# EAGLE board untitled 2 (EAGLE 7.4.0)
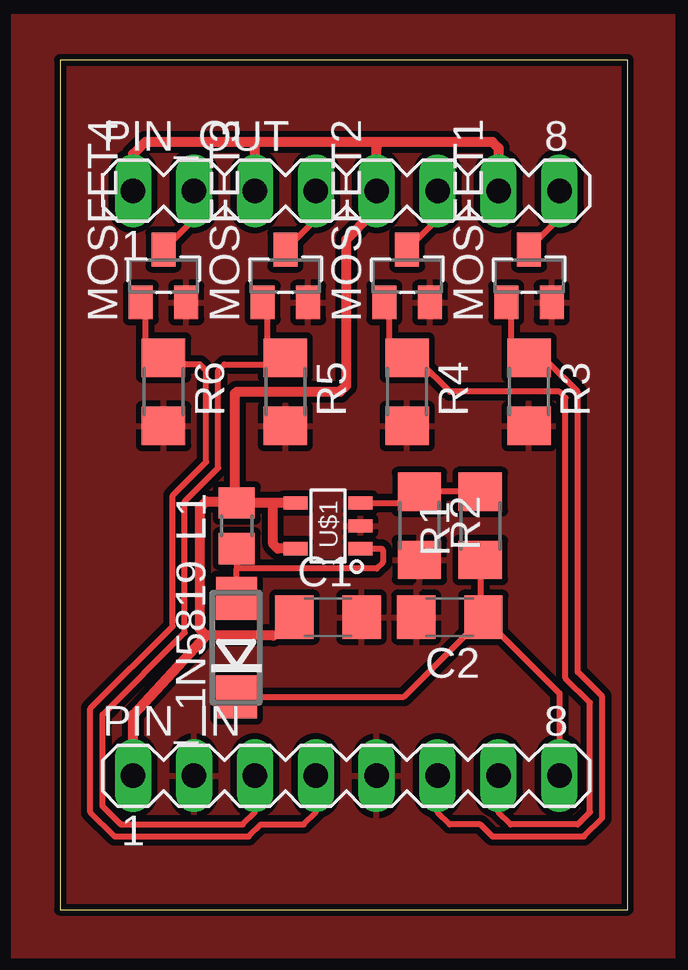
[diagram p0: board, top side]

Size 23.67 x 35.42 mm. Coordinates in mm from the lower left corner, seen from the top.
Outline: 0,0 23.67,0 23.67,35.42 0,35.42 0,0
Copper layers (1*16): Top 0.035mm / dielectric 1.5mm / Bottom 0.035mm
Design rules "default 10mils": minimum track width 10mil, minimum drill 24mil, track to track 10mil, track to pad 10mil, pad to pad 10mil, via to via 10mil, smd to smd 10mil, copper to edge 10mil, drill to drill 10mil, minimum pad ring 10mil, minimum via ring 8mil, stop-mask expansion 4mil, vias tented up to drill 0mil, thermal gap 12mil

## Footprints (pad centres in the part's own frame; a part is rotated, then mirrored left to right if it is on the bottom)
DO214AC = smd 1.8 x 1.7: A 2.05,0; C -2.05,0
C1206 = smd 1.6 x 1.8: 1 -1.4,0; 2 1.4,0
R0805 = smd 1.3 x 1.5: 1 -0.95,0; 2 0.95,0
SOT-23 = smd 1 x 1.4: 1 -0.95,-1.1; 2 0.95,-1.1; 3 0,1.1
MA08-1 = drill 1.016 long: 1 -8.89,0; 2 -6.35,0; 3 -3.81,0; 4 -1.27,0; 5 1.27,0; 6 3.81,0; 7 6.35,0; 8 8.89,0
R1206 = smd 1.6 x 1.803: 1 -1.422,0; 2 1.422,0
SOT-23-5 = smd 1 x 0.55: 1 -1.35,0.95; 2 -1.35,0; 3 -1.35,-0.95; 4 1.35,-0.95; 5 1.35,0.95

## Placement (x,y rotation side)
1N5819  [DO214AC]  7.37,10.92 90 top
C1  1uF  [C1206]  11.18,12.19 0 top
C2  1uF  [C1206]  16.26,12.19 180 top
L1  10uH  [R0805]  7.37,16 90 top
MOSFET1  AO3400A  [SOT-23]  19.56,26.42 0 top
MOSFET2  AO3400A  [SOT-23]  14.48,26.42 0 top
MOSFET3  AO3400A  [SOT-23]  9.4,26.42 0 top
MOSFET4  AO3400A  [SOT-23]  4.32,26.42 0 top
PIN_IN  [MA08-1]  11.94,5.59 0 top
PIN_OUT  [MA08-1]  11.94,29.97 0 top
R1  3k  [R1206]  17.53,16 90 top
R2  1k  [R1206]  14.99,16 270 top
R3  1k  [R1206]  19.56,21.59 270 top
R4  1k  [R1206]  14.48,21.59 270 top
R5  1k  [R1206]  9.4,21.59 270 top
R6  1k  [R1206]  4.32,21.59 270 top
U$1  [SOT-23-5]  11.18,16 180 top

## Library data of the parts
1N5819 = diode
C1 C2 L1 R1-R6 = resistor
MOSFET1-MOSFET4 U$1 = smd-footprints
PIN_IN PIN_OUT = con-lstb; OC_FARNELL: unknown; OC_NEWARK: unknown

## Nets
+5V: 1N5819.C C2.1 PIN_IN.8 R1.1
GND: C1.2 C2.2 MOSFET1.2 MOSFET2.2 MOSFET3.2 MOSFET4.2 PIN_IN.2 PIN_IN.5 R2.2 R3.2 R4.2 R5.2 R6.2 U$1.2
M1_IN: MOSFET1.1 PIN_IN.6 R3.1
M1_OUT: MOSFET1.3 PIN_OUT.8
M2_IN: MOSFET2.1 PIN_IN.7 R4.1
M2_OUT: MOSFET2.3 PIN_OUT.6
M3_IN: MOSFET3.1 PIN_IN.3 R5.1
M3_OUT: MOSFET3.3 PIN_OUT.4
M4_IN: MOSFET4.1 PIN_IN.4 R6.1
M4_OUT: MOSFET4.3 PIN_OUT.2
N$1: 1N5819.A L1.1 U$1.1
N$3: R1.2 R2.1 U$1.3
VCC: C1.1 L1.2 PIN_IN.1 PIN_OUT.1 PIN_OUT.3 PIN_OUT.5 PIN_OUT.7 U$1.4 U$1.5

## Tracks (layer width: path | path; a pad name or v marks a point on that pad's centre or on a via)
+5V
  Top 0.254: R1.1 17.53,12.32 C2.1 | C2.1 20.83,9.02 PIN_IN.8 | 1N5819.C 14.34,8.87 C2.1
GND
  Top 0.254: MOSFET3.2 10.5,25.32 | MOSFET2.2 15.58,25.32 | MOSFET1.2 20.66,25.32 | 14.48,14.99 14.58,14.99 R2.2 | R5.2 9.63,20.17 | R4.2 14.83,20.17
  pour Top (isolate 0.254): -1.78,37.08 25.4,37.08 25.4,-1.78 -1.78,-1.78
M1_IN
  Top 0.254: MOSFET1.1 18.8,25.32 18.8,22.99 19.56,22.99 R3.1 19.71,22.86 20.32,22.86 21.59,21.59 21.59,9.91 22.61,8.89 22.61,3.81 21.84,3.05 18.03,3.05 17.53,3.56 16.26,3.56 15.75,4.06 PIN_IN.6
M1_OUT
  Top 0.254: MOSFET1.3 19.56,27.56 20.83,28.83 PIN_OUT.8
M2_IN
  Top 0.254: MOSFET2.1 13.72,25.32 13.72,22.99 14.48,22.99 R4.1 14.63,22.86 14.99,22.86 16.26,21.59 20.83,21.59 21.08,21.34 21.08,9.65 22.1,8.64 22.1,4.06 21.59,3.56 18.8,3.56 18.29,4.06 PIN_IN.7
M2_OUT
  Top 0.254: MOSFET2.3 15.75,28.79 PIN_OUT.6
M3_IN
  Top 0.254: R5.1 9.37,22.99 8.64,22.99 8.64,25.32 MOSFET3.1 | 9.25,22.86 R5.1 | PIN_IN.3 8.13,4.06 7.62,3.56 2.54,3.56 1.78,4.32 1.78,8.13 5.21,11.56 5.21,17.02 6.6,18.41 6.6,22.48 6.86,22.73 9.12,22.73 R5.1
M3_OUT
  Top 0.254: MOSFET3.3 10.67,28.79 PIN_OUT.4
M4_IN
  Top 0.254: MOSFET4.1 3.56,25.32 3.56,22.99 4.29,22.99 R6.1 4.6,22.73 5.84,22.73 6.1,22.48 6.1,18.67 4.7,17.27 4.7,11.81 1.27,8.38 1.27,4.06 2.29,3.05 7.87,3.05 8.38,3.56 10.16,3.56 10.67,4.06 PIN_IN.4
M4_OUT
  Top 0.254: MOSFET4.3 5.59,28.79 PIN_OUT.2
N$1
  Top 0.254: U$1.1 13.4,15.05 13.46,14.99 13.46,14.48 13.21,14.22 7.37,14.22 | L1.1 7.37,14.22 | 1N5819.A 7.37,14.22
N$2
  pour Top: -2.03,37.34 25.65,37.34 25.65,-2.03 -2.03,-2.03
N$3
  Top 0.254: R1.2 R2.1 14.51,16.95 U$1.3
VCC
  Top 0.254: C1.1 9.65,12.19 8.89,11.43 | 7.3,17.02 L1.2 | 7.3,21.52 7.37,21.59
  Top 0.406: PIN_OUT.1 3.05,31.5 3.56,32 8.13,32 | PIN_OUT.7 18.29,31.75 18.03,32 13.21,32 | PIN_OUT.3 8.13,32 | U$1.4 8.89,16.95 | 8.89,16.95 L1.2 | U$1.5 9.08,15.05 8.89,15.24 8.89,16.95 | 8.89,11.43 6.1,11.43 | 6.1,11.43 5.84,11.68 5.84,16.76 6.1,17.02 7.3,17.02 7.3,21.52 | PIN_IN.1 3.05,8.13 6.1,11.43 | 7.37,21.59 11.68,21.59 11.94,21.84 11.94,27.94 12.95,28.96 12.95,29.72 PIN_OUT.5 13.21,30.99 13.21,31.75 13.21,32 | 13.21,32 8.13,32

## Text on the board
Description: VCC | M4 / OUT | VCC | M3 / OUT | VCC | M2 / OUT | VCC | M1 / OUT | PODLEWACZ v1.0 / Sh4DoV | 3.7V | GND | M3 / IN | M4 / IN | GND | M1 / IN | M2 / IN | 5V / OUT